# Altium PCB Barelang-FC Strategy.PcbDoc
Units mm, origin at the board's own origin, x right, y up, seen from the top; angles counter-clockwise.
Board outline 65 x 30 mm, 2 copper layers (Top Layer, Bottom Layer), stack 1.544 mm thick; 30 components, 31 nets, 136 pads, 24 vias.
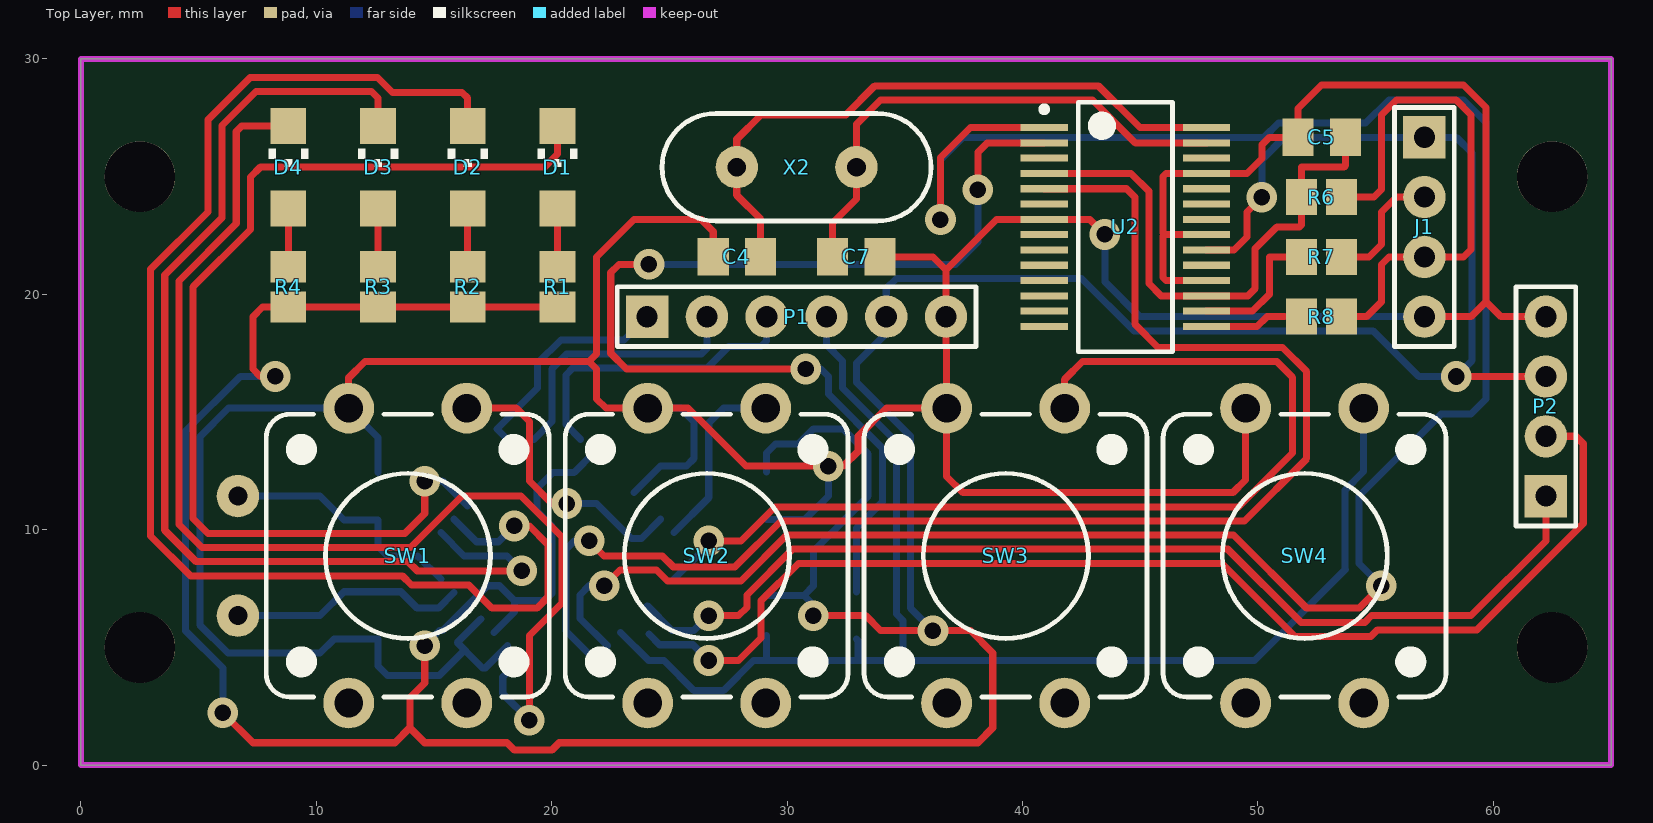
[diagram p0: Top Layer view]
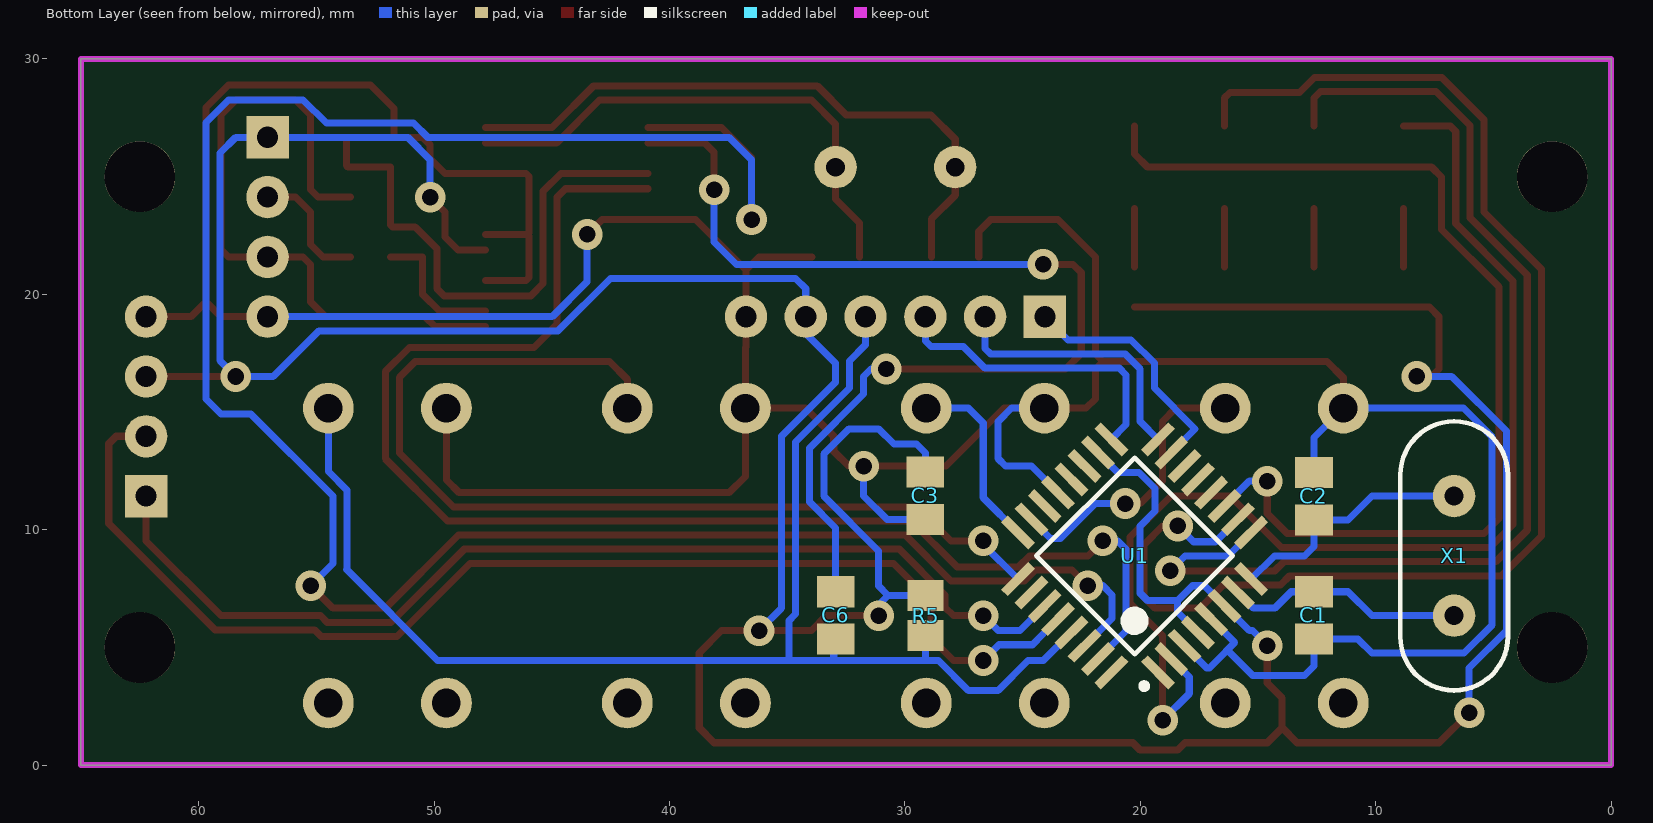
[diagram p1: Bottom Layer view, seen from below]

## Layer stack, top to bottom
Top Solder: solder mask 0.0102, Solder Resist, Dk 3.5
Top Layer: signal copper 0.0356
Dielectric 1: dielectric 1.4732, FR-4, Dk 4.8
Bottom Layer: signal copper 0.0356
Bottom Solder: solder mask 0.0102, Solder Resist, Dk 3.5

## Board outline
0,0 65,0 65,30 0,30

## Design rules (kind name [scope] priority, off if disabled: settings)
Clearance [All] p1: gap=0.3
ComponentClearance [All] p1: gap=0 collisioncheckmode=3 verticalgap=0 showdistances=FALSE
HoleSize [All] p1: absolutevalues=TRUE maxlimit=3 minlimit=0.7 maxpercent=80.000 minpercent=20.000
PolygonConnect [All] p1: connectstyle=Relief reliefconductorwidth=0.254 reliefentries=4 polygonreliefangle="90 Angle" airgapwidth=0.254
RoomDefinition "USB To Serial" [InComponentClass('USB To Serial ')] p1: confinementstyle=ConfineIn formatcopy=TRUE lockcomponents=FALSE outline 65,30 0,30 0,0 65,0
RoomDefinition "Barelang-FC Strategy" [InComponentClass('Barelang-FC Strategy')] p2: confinementstyle=ConfineIn formatcopy=TRUE lockcomponents=FALSE outline 0,0 65,0 65,30 0,30
RoutingVias [All] p1: holewidth=0.7 width=1.3 viastyle="Through Hole" minholewidth=0.7 minwidth=1.3 maxholewidth=0.7 maxwidth=1.3
SolderMaskExpansion [All] p1: expansion=0.102
Width [All] p1: maxlimit=1 minlimit=0.3 preferedwidth=0.5
27 further rules are at their usual default settings.

## Classes and differential pairs
component class "USB To Serial": C4 C5 C6 C7 J1 R6 R7 R8 U2 X2
component class "Barelang-FC Strategy": C1 C2 C3 D1 D2 D3 D4 P1 P2 R1 R2 R3 R4 R5 SW1 SW2 SW3 SW4 U1 X1

## Components (designator, comment, footprint, x,y, rotation, side; value= is the part's Value field where it differs from the comment)
C1 "22pF" C0805 12.62,6.35 r90 bottom
C2 "22pF" C0805 12.62,11.43 r270 bottom
C3 "100nF" C0805 29.13,11.43 r90 bottom
C4 "22pF" C0805 27.86,21.59 r0 top
C5 "100nF" C0805 52.705,26.67 r0 top
C6 "100nF" C0805 32.94,6.35 r90 bottom
C7 "22pF" C0805 32.94,21.59 r180 top
D1 "LED" CHIPLED_1206 20.24,25.4 r0 top
D2 "LED" CHIPLED_1206 16.43,25.4 r0 top
D3 "LED" CHIPLED_1206 12.62,25.4 r0 top
D4 "LED" CHIPLED_1206 8.81,25.4 r0 top
J1 "USB" HDR1X4 57.07,26.67 r270 top
P1 "Header 6" HDR1X6 24.05,19.05 r0 top
P2 "COMPASS" HDR1X4 62.23,11.43 r90 top
R1 "220" R0805 20.24,20.32 r270 top
R2 "220" R0805 16.43,20.32 r270 top
R3 "220" R0805 12.62,20.32 r270 top
R4 "220" R0805 8.81,20.32 r270 top
R5 "10K" R0805 29.122,6.35 r90 bottom
R6 "1K5" R0805 52.705,24.13 r180 top
R7 "22" R0805 52.705,21.59 r180 top
R8 "22" R0805 52.705,19.05 r180 top
SW1 "4Pin" TACTILE-PTH-12MM 13.89,8.89 r90 top
SW2 "4Pin" TACTILE-PTH-12MM 26.59,8.89 r90 top
SW3 "4Pin" TACTILE-PTH-12MM 39.29,8.89 r90 top
SW4 "4Pin" TACTILE-PTH-12MM 51.99,8.89 r90 top
U1 "ATmega8-16AI" 32A_N 20.24,8.89 r45 bottom
U2 "PL2303HX-A" SSOP-28 44.37,22.86 r0 top
X1 "16MHz" HC49US 6.667,8.89 r270 bottom
X2 "12MHz" HC49US 30.4,25.4 r180 top

## Footprints (in the part's own frame and the unit in brackets; to place one, negate y for a bottom-side part, rotate by r counter-clockwise, add the part's x,y. Pads: shape width x height; smd on the part's side, far side on the other; paste and mask are expansions set on the pad)
32A_N [mm] "Thin QFP, 32-Leads, Body 7x7mm, Pitch 0.8mm, IPC Medium Density"
  rect 1.65x0.4 smd: 1(-4.2,2.8) 2(-4.2,2) 3(-4.2,1.2) 4(-4.2,0.4) 5(-4.2,-0.4) 6(-4.2,-1.2) 7(-4.2,-2) 8(-4.2,-2.8) 17(4.2,-2.8) 18(4.2,-2) 19(4.2,-1.2) 20(4.2,-0.4) 21(4.2,0.4) 22(4.2,1.2) 23(4.2,2) 24(4.2,2.8)
  rect 0.4x1.65 smd: 9(-2.8,-4.2) 10(-2,-4.2) 11(-1.2,-4.2) 12(-0.4,-4.2) 13(0.4,-4.2) 14(1.2,-4.2) 15(2,-4.2) 16(2.8,-4.2) 25(2.8,4.2) 26(2,4.2) 27(1.2,4.2) 28(0.4,4.2) 29(-0.4,4.2) 30(-1.2,4.2) 31(-2,4.2) 32(-2.8,4.2)
  silkscreen extent -4.32,-2.95 2.95,3.75, body extent -3.5,-3.5 3.5,3.5, height 1.2
C0805 [mil]
  rect 52x63 smd: 1(-39.37,0) 2(40,0)
CHIPLED_1206 [mil]
  rect 60x60 smd: 1(0,-68.9) 2(0,69)
  silkscreen extent -33,0 34,31
HC49US [mm]
  round 1.8 hole 0.8: 1(-2.54,0) 2(2.54,0)
  silkscreen extent -5.71,-2.29 5.71,2.29
HDR1X4 [mm] "Connector; Header; 4 Position"
  rect 1.8x1.8 hole 0.9: 1(0,0)
  round 1.8 hole 0.9: 2(2.54,0) 3(5.08,0) 4(7.62,0)
  silkscreen extent -1.27,-1.27 8.89,1.27
HDR1X6 [mm] "Connector; Header; 6 Position"
  rect 1.8x1.8 hole 0.9: 1(0,0)
  round 1.8 hole 0.9: 2(2.54,0) 3(5.08,0) 4(7.62,0) 5(10.16,0) 6(12.7,0)
  silkscreen extent -1.27,-1.27 13.97,1.27
R0805 [mil]
  rect 52x60 smd: 1(-33.46,0) 2(34,0)
SSOP-28 [mm]
  rect 2x0.3 smd: 1(-3.45,4.225) 2(-3.45,3.575) 3(-3.45,2.925) 4(-3.45,2.275) 5(-3.45,1.625) 6(-3.45,0.975) 7(-3.45,0.325) 8(-3.45,-0.325) 9(-3.45,-0.975) 10(-3.45,-1.625) 11(-3.45,-2.275) 12(-3.45,-2.925) 13(-3.45,-3.575) 14(-3.45,-4.225) 15(3.45,-4.225) 16(3.45,-3.575) 17(3.45,-2.925) 18(3.45,-2.275) 19(3.45,-1.625) 20(3.45,-0.975) 21(3.45,-0.325) 22(3.45,0.325) 23(3.45,0.975) 24(3.45,1.625) 25(3.45,2.275) 26(3.45,2.925) 27(3.45,3.575) 28(3.45,4.225)
  silkscreen extent -3.57,-5.3 2,5.3
TACTILE-PTH-12MM [mil]
  round 85 hole 48: 1(247,-98.43) 2(247,99) 3(-246.06,-98.43) 4(-246.06,99)
  silkscreen extent -236,-236 237,237

## Part data
C1 C2 C3: library part Capacitor
C4 C5 C6 C7: library part Cap, "Capacitor"
P1: "Header, 6-Pin"
P2: library part "Header 4", "Header, 4-Pin"
R1 R2 R3 R4 R5: library part Resistor
R6 R7 R8: library part Res1, "Resistor"
SW1 SW2 SW3 SW4: library part "Switch Pushbutton"
U1: "8-Bit AVR Microcontroller with 8K Bytes of In-System Programmable Flash Memory"
U2: library part "PL2303HX Rev. A"
X1: library part Crystal
X2: library part XTAL, "Crystal Oscillator"

## Free pads (board coordinates)
  round 3 hole 3: ""(2.5,5) ""(2.5,25) ""(62.5,5) ""(62.5,25)

## Via types
v1: diameter 1.3, hole 0.7, Top Layer to Bottom Layer, 21 vias
v2: diameter 1.3, hole 0.711, Top Layer to Bottom Layer, 3 vias

## Nets (pads, with @x,y where several pads share a name; then routed paths per layer and width w, separated by ;. In a path a pad name is that pad's centre, name@x,y a point inside that pad or via, vN(x,y) a via of type N, cw(c..) or ccw(c..) an arc to the next point about the centre after c; other vN are vias at no path point)
3V3: C5.2 R6.2 U2.4 U2.17 | length 23.2
  Top Layer w0.3: U2.4 44.611,25.135 45.367,24.379 45.367,20.459 45.891,19.935 U2.17 49.566,19.935 49.883,20.251 49.883,21.943 50.8,22.86 51.753,22.86 51.841,22.949 R6.2 51.841,25.4 53.657,25.4 53.721,25.463 C5.2
DOWN: SW3.1 U1.25 | length 43.3
  Top Layer w0.3: v1(26.67,9.525) 28.038,9.525 29.486,10.972 49.176,10.972 51.47,13.266 51.47,16.475 50.8,17.145 42.545,17.145 41.79,16.39 SW3.1
  Bottom Layer w0.3: U1.25 26.67,9.38 v1(26.67,9.525)
GND: C1.1 C2.1 C3.1 C4.1 C5.1 C7.1 J1.4 P1.6 P2.4 SW1.2 SW2.2 SW3.2 SW4.2 U1.3 U1.5 U1.21 U2.7 U2.18 U2.21 U2.25 | length 180.8
  Top Layer w0.3: SW1.2 11.375,16.455 12.065,17.145 21.59,17.145 ; C4.1 26.86,22.67 26.352,23.177 23.495,23.177 21.907,21.59 21.907,17.462 21.59,17.145 ; C7.1 36.195,21.59 36.75,21.035 ; v1(43.498,22.543) 42.855,23.185 U2.7 38.9,23.185 36.75,21.035 ; U2.18 46.09,20.585 45.967,20.708 45.967,22.472 46.03,22.535 ; U2.21 46.03,22.535 ; SW4.2 49.475,12.12 48.928,11.572 37.465,11.572 36.775,12.262 SW3.2 ; J1.4 59.055,19.05 59.69,19.685 ; P2.4 60.325,19.05 59.69,19.685 ; 21.59,17.145 21.907,16.828 21.907,15.557 22.301,15.164 SW2.2 25.794,15.164 28.258,12.7 v1(31.75,12.7) 32.385,12.7 33.02,13.335 33.02,13.97 34.214,15.164 SW3.2 ; 36.75,21.035 P1.6 36.75,17.755 36.775,17.729 SW3.2 ; 46.03,22.535 45.967,22.597 45.967,25.012 46.09,25.135 U2.25 49.53,25.135 50.165,25.77 50.165,26.352 50.483,26.67 C5.1 51.705,27.893 52.705,28.892 58.737,28.892 59.69,27.94 59.69,19.685
  Bottom Layer w0.3: C2.1 12.62,13.919 SW1.2 6.274,15.164 5.05,13.94 5.05,5.959 6.246,4.763 10.16,4.763 10.748,5.35 C1.1 12.62,4.207 13.018,3.81 15.222,3.81 16.302,4.891 ; U1.5 15.989,5.204 16.302,4.891 ; U1.3 17.175,4.127 17.066,4.127 17.024,4.17 16.47,4.723 16.302,4.891 ; U1.21 24.616,12.7 25.717,12.7 26.035,13.018 26.035,14.605 25.476,15.164 SW2.2 ; C3.1 30.75,10.43 31.75,11.43 v1(31.75,12.7) ; v1(43.498,22.543) 43.498,20.534 44.981,19.05 J1.4
LED1: D4.2 U1.2 | length 50.1
  Top Layer w0.3: D4.2 6.833,27.153 6.597,26.917 6.597,23.004 4.163,20.569 4.163,10.229 5.149,9.243 14.005,9.243 16.192,11.43 18.701,11.43 20.432,9.698 20.432,6.884 19.05,5.501 v1(19.05,1.905)
  Bottom Layer w0.3: U1.2 17.92,3.741 17.92,3.035 v1(19.05,1.905)
LED2: D3.2 U1.9 | length 46.7
  Top Layer w0.3: D3.2 12.62,28.337 12.347,28.61 7.441,28.61 5.997,27.166 5.997,23.252 3.563,20.817 3.563,9.98 4.9,8.643 13.9,8.643 14.287,8.255 v1(18.732,8.255)
  Bottom Layer w0.3: U1.9 16.28,8.89 18.098,8.89 v1(18.732,8.255)
LED3: D2.2 U1.10 | length 57.6
  Top Layer w0.3: D2.2 16.43,28.337 16.192,28.575 13.231,28.575 12.596,29.21 7.193,29.21 5.397,27.415 5.397,23.501 2.963,21.066 2.963,9.732 4.652,8.043 13.651,8.043 14.039,7.655 16.475,7.655 17.462,6.667 19.367,6.667 19.833,7.133 19.833,9.377 19.05,10.16 v1(18.415,10.16)
  Bottom Layer w0.3: U1.10 16.812,9.49 17.745,9.49 v1(18.415,10.16)
LED4: D1.2 U1.11 | length 44.2
  Top Layer w0.3: v1(14.605,12.065) 14.605,10.691 13.756,9.842 5.397,9.842 4.763,10.477 4.763,20.32 7.197,22.755 7.197,24.977 7.62,25.4 19.685,25.4 20.24,25.955 D1.2
  Bottom Layer w0.3: v1(14.605,12.065) 15.368,12.065 U1.11
MISO: P1.2 U1.16 | length 11.6
  Bottom Layer w0.3: U1.16 20.002,14.592 20.002,16.828 20.637,17.462 26.352,17.462 26.59,17.7 P1.2
MOSI: P1.1 U1.15 | length 10.4
  Bottom Layer w0.3: U1.15 17.674,14.285 19.403,16.013 19.403,17.076 20.389,18.062 23.062,18.062 P1.1
NetC4_2: C4.2 U2.28 X2.2 | length 27.1
  Top Layer w0.3: C4.2 28.876,23.194 27.86,24.21 X2.2 27.86,26.59 28.892,27.622 32.489,27.622 33.724,28.857 43.215,28.857 44.988,27.085 U2.28
NetC6_2: C6.2 U2.2 | length 46.6
  Top Layer w0.3: v1(24.13,21.273) 22.86,21.273 22.507,20.92 22.507,17.498 23.177,16.828 v1(30.797,16.828) ; v1(38.1,24.447) 38.1,26.035 38.5,26.435 U2.2
  Bottom Layer w0.3: v1(24.13,21.273) 37.148,21.273 38.1,22.225 v1(38.1,24.447) ; v1(30.797,16.828) 31.432,16.828 31.75,16.51 31.75,15.765 34.043,13.473 34.043,11.183 32.94,10.08 C6.2
NetC7_2: C7.2 U2.27 X2.1 | length 22.1
  Top Layer w0.3: C7.2 31.924,23.034 32.94,24.05 X2.1 32.94,27.225 33.973,28.258 42.966,28.258 44.789,26.435 U2.27
NetD1_1: D1.1 R1.1 | length 2.5
  Top Layer w0.3: R1.1 D1.1
NetD2_1: D2.1 R2.1 | length 2.5
  Top Layer w0.3: R2.1 D2.1
NetD3_1: D3.1 R3.1 | length 2.5
  Top Layer w0.3: R3.1 D3.1
NetD4_1: D4.1 R4.1 | length 2.5
  Top Layer w0.3: R4.1 D4.1
NetJ1_2: J1.2 R7.1 | length 5.4
  Top Layer w0.3: R7.1 54.714,21.59 55.245,22.121 55.245,23.495 55.88,24.13 J1.2
NetJ1_3: J1.3 R6.1 R8.1 | length 22.7
  Top Layer w0.3: R8.1 54.61,19.05 55.245,19.685 55.245,21.273 55.562,21.59 J1.3 58.737,21.59 59.055,21.907 59.055,27.622 58.42,28.258 55.88,28.258 55.245,27.622 55.245,24.447 54.927,24.13 R6.1
NetR7_2: R7.2 U2.16 | length 5.9
  Top Layer w0.3: U2.16 49.765,19.285 50.483,20.002 50.483,21.59 R7.2
NetR8_2: R8.2 U2.15 | length 3.5
  Top Layer w0.3: U2.15 49.964,18.635 50.379,19.05 51.126,19.05
RST: C6.1 P1.4 R5.1 SW4.1 U1.29 | length 59.1
  Bottom Layer w0.3: U1.29 24.119,4.445 24.765,4.445 26.035,3.175 27.305,3.175 28.575,4.445 29.21,4.445 ; R5.1 29.122,4.533 29.21,4.445 ; P1.4 31.67,17.855 32.35,17.175 32.35,16.014 34.643,13.721 34.643,6.419 34.925,6.136 34.925,4.445 ; C6.1 33.02,5.27 33.02,4.445 ; SW4.1 54.49,12.476 53.693,11.679 53.693,8.324 53.709,8.307 49.848,4.445 34.925,4.445 ; 29.21,4.445 33.02,4.445 ; 33.02,4.445 34.925,4.445
RXD: U1.30 U2.1 | length 97.6
  Top Layer w0.3: v1(22.225,7.62) 22.895,8.29 24.446,8.29 24.911,7.825 28.035,7.825 29.983,9.772 48.965,9.772 52.07,6.667 54.292,6.667 v1(55.245,7.62) ; v1(36.513,23.177) 36.513,25.815 37.783,27.085 U2.1
  Bottom Layer w0.3: v1(22.225,7.62) 21.59,7.62 21.202,7.232 21.202,6.23 U1.30 ; v1(36.513,23.177) 36.513,25.717 37.465,26.67 50.269,26.67 50.869,27.27 54.575,27.27 55.562,28.258 58.737,28.258 59.69,27.305 59.69,15.557 59.055,14.922 57.785,14.922 54.292,11.43 54.292,8.572 v1(55.245,7.62)
SCK: P1.3 U1.17 | length 13.2
  Bottom Layer w0.3: U1.17 20.602,14.467 20.602,16.579 20.886,16.863 26.601,16.863 27.519,17.78 28.892,17.78 29.13,18.018 P1.3
SCL: P2.2 U1.28 | length 51.2
  Top Layer w0.3: v2(26.67,4.445) 27.94,4.445 28.892,5.397 28.892,6.985 30.48,8.572 48.468,8.572 51.573,5.468 54.79,5.468 55.072,5.75 59.304,5.75 63.817,10.264 63.817,13.652 63.5,13.97 P2.2
  Bottom Layer w0.3: 24.13,5.566 24.581,5.115 26,5.115 v2(26.67,4.445)
SDA: P2.1 U1.27 | length 45
  Top Layer w0.3: v2(26.67,6.35) 27.94,6.35 28.293,6.703 28.293,7.234 30.231,9.172 48.716,9.172 51.821,6.068 54.541,6.068 54.824,6.35 59.055,6.35 62.23,9.525 P2.1
  Bottom Layer w0.3: U1.27 25.112,5.715 26.035,5.715 v2(26.67,6.35)
START: SW1.1 U1.23 | length 12.3
  Top Layer w0.3: SW1.1 18.491,15.164 19.05,14.605 19.05,12.065 20.002,11.112 v1(20.637,11.112)
  Bottom Layer w0.3: v1(20.637,11.112) 21.907,11.112 23.386,9.634 23.812,9.634 U1.23
TXD: U1.31 U2.5 | length 60.4
  Top Layer w0.3: v1(21.59,9.525) 22.225,8.89 24.695,8.89 25.16,8.425 27.787,8.425 29.734,10.372 49.425,10.372 52.07,13.018 52.07,16.724 51.049,17.745 45.755,17.745 44.768,18.732 44.768,24.13 44.413,24.485 U2.5
  Bottom Layer w0.3: v1(21.59,9.525) 20.955,9.525 20.602,9.172 20.602,5.699 U1.31
UP: SW2.1 U1.24 | length 7.9
  Bottom Layer w0.3: U1.24 26.67,11.36 26.67,14.529 27.305,15.164 SW2.1
VCC: C3.2 J1.1 P1.5 P2.3 R1.2 R2.2 R3.2 R4.2 R5.2 U1.4 U1.6 U1.18 U2.20 | length 186.5
  Top Layer w0.3: v1(6.032,2.222) 7.302,0.953 13.335,0.953 13.97,1.587 ; v1(8.255,16.51) 7.62,16.51 7.302,16.828 7.302,19.05 7.709,19.456 R4.2 R3.2 R2.2 R1.2 ; v1(14.605,5.08) 14.605,3.492 13.97,2.857 13.97,1.587 ; v1(31.115,6.35) 33.338,6.35 33.973,5.715 v1(36.195,5.715) 37.783,5.715 38.735,4.763 38.735,1.587 38.1,0.953 20.32,0.953 20.002,0.635 18.415,0.635 18.098,0.953 14.605,0.953 13.97,1.587 ; U2.20 48.976,21.885 49.53,22.439 49.53,23.495 v1(50.165,24.13) ; v2(58.42,16.51) P2.3
  Bottom Layer w0.3: v1(6.032,2.222) 6.032,4.127 4.45,5.71 4.45,14.189 6.771,16.51 v1(8.255,16.51) ; v1(14.605,5.08) 15.24,5.715 15.368,5.715 U1.6 17.273,7.62 17.78,7.62 18.415,6.985 ; U1.4 18.415,6.499 18.415,6.985 ; U1.18 20.955,12.433 20.053,12.433 19.367,11.747 19.367,10.795 20.002,10.16 20.002,7.302 19.685,6.985 18.415,6.985 ; R5.2 30.709,7.214 ; C3.2 29.13,13.255 29.509,13.634 30.462,13.634 31.115,14.287 32.379,14.287 33.443,13.224 33.443,11.431 31.115,9.104 31.115,7.62 30.709,7.214 ; v1(31.115,6.35) 31.115,6.807 30.709,7.214 ; v1(36.195,5.715) 35.243,6.667 35.243,13.97 32.95,16.263 32.95,17.075 34.21,18.335 P1.5 34.21,20.24 34.643,20.673 42.51,20.673 44.732,18.45 54.892,18.45 56.832,16.51 v2(58.42,16.51) 59.09,17.18 59.09,26 58.42,26.67 J1.1 51.118,26.67 50.165,25.717 v1(50.165,24.13)
XTAL1: C1.2 U1.7 X1.2 | length 9.9
  Bottom Layer w0.3: X1.2@6.985,6.35 10.16,6.35 11.176,7.366 C1.2 13.589,7.366 14.287,6.667 15.189,6.667 U1.7
XTAL2: C2.2 U1.8 X1.1 | length 10.4
  Bottom Layer w0.3: X1.1@6.985,11.43 10.16,11.43 11.176,10.414 C2.2 12.62,9.287 13.018,8.89 14.3,8.89 U1.8
pads on no net: SW1.3 SW1.4 SW2.3 SW2.4 SW3.3 SW3.4 SW4.3 SW4.4 U1.1 U1.12 U1.13 U1.14 U1.19 U1.20 U1.22 U1.26 U1.32 U2.3 U2.6 U2.8 U2.9 U2.10 U2.11 U2.12 U2.13 U2.14 U2.19 U2.22 U2.23 U2.24 U2.26

## Keep-outs
Keep-Out Layer:
  the board outline again, w0.254